# Altium PCB 继电器控制模块.PcbDoc
Units mm, origin at the board's own origin, x right, y up, seen from the top; angles counter-clockwise.
Board outline 101.6 x 152.4 mm, 2 copper layers (Top Layer, Bottom Layer); 35 components, 38 nets, 99 pads, 6 vias.
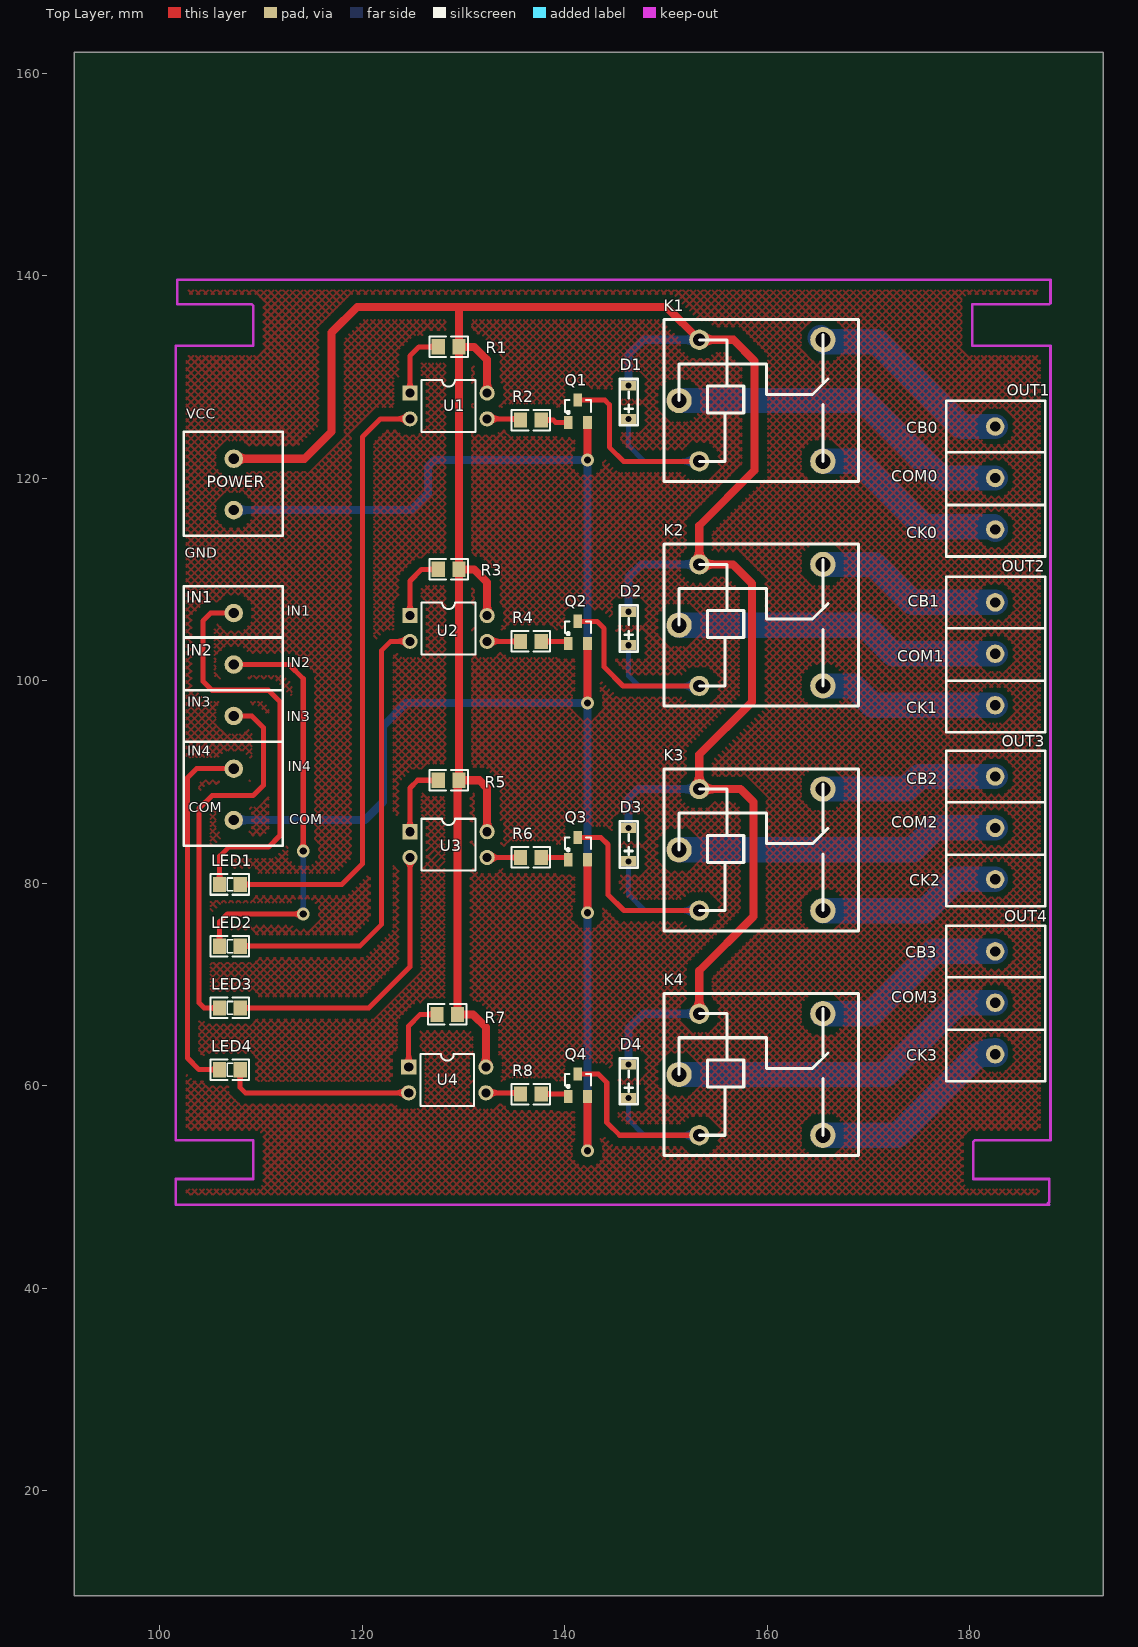
[diagram p0: Top Layer view]
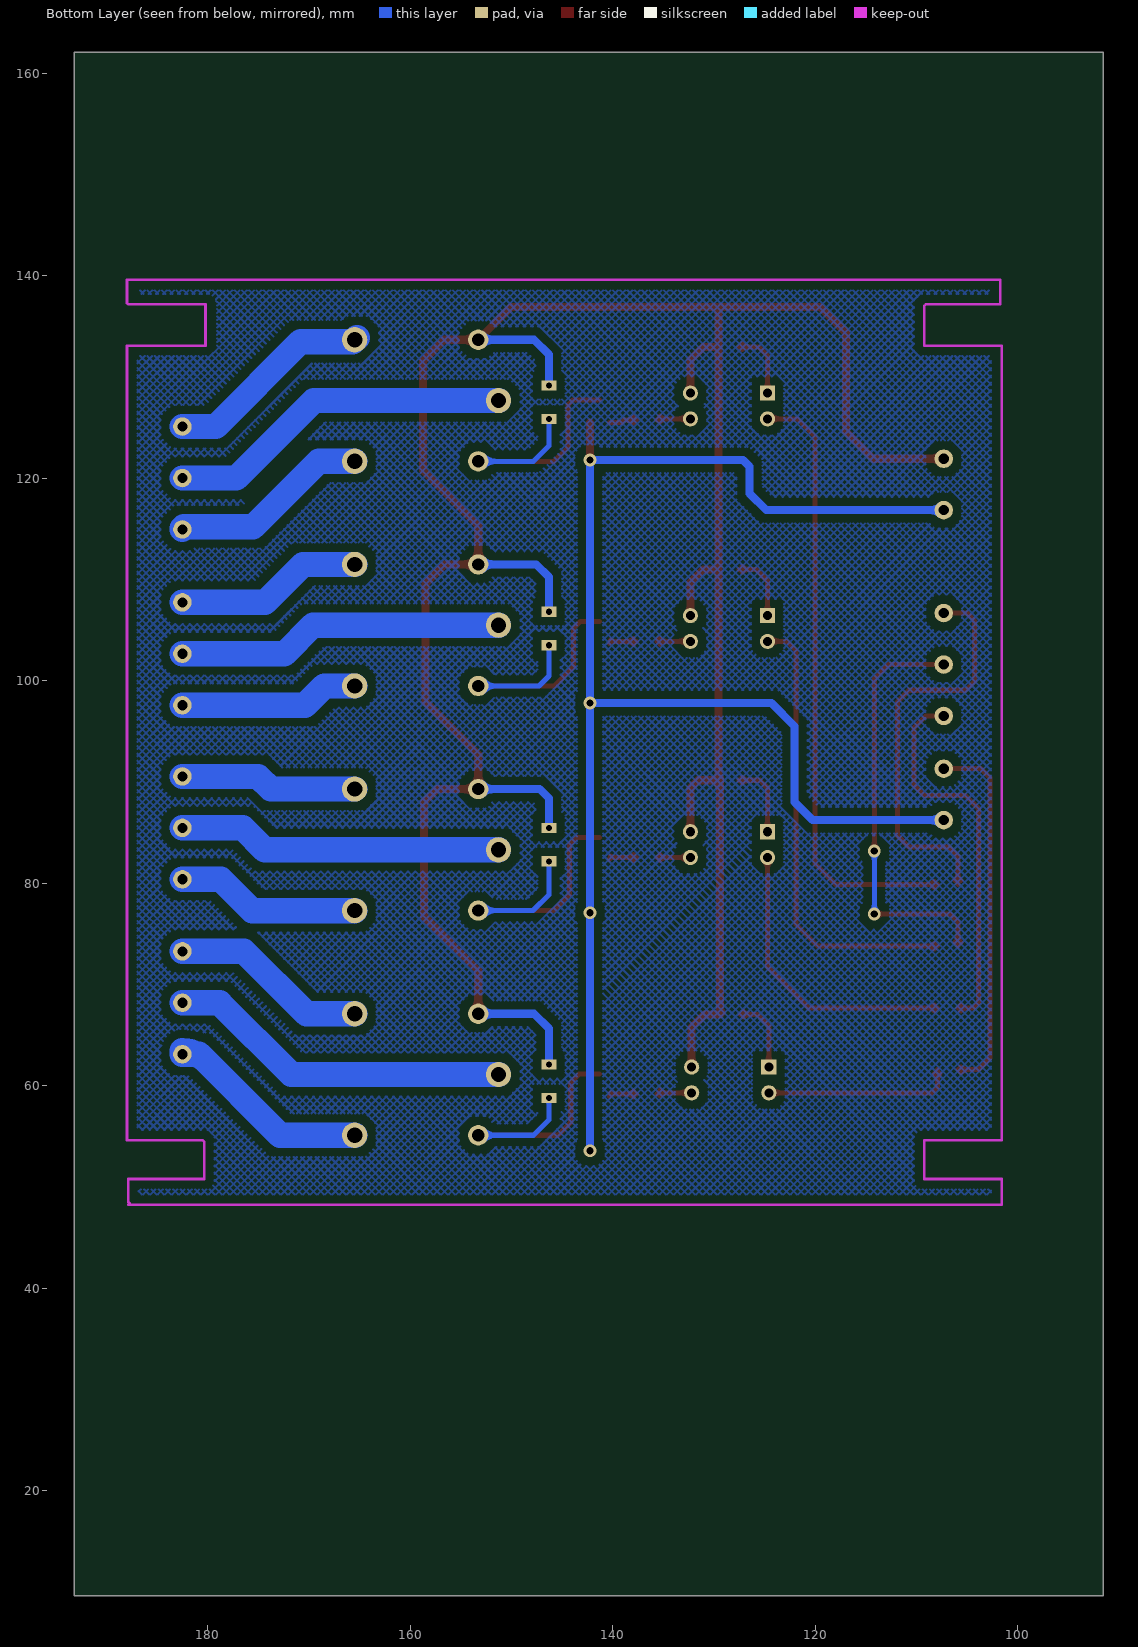
[diagram p1: Bottom Layer view, seen from below]

## Layer stack, top to bottom
Top Layer: signal copper 0.0356
Dielectric: dielectric 0.32, FR-4, Dk 4.8
Bottom Layer: signal copper 0.0356

## Board outline
193.167,9.652 193.167,162.052 91.567,162.052 91.567,9.652

## Design rules (kind name [scope] priority, off if disabled: settings)
Clearance [All] p1: gap=0.8
ComponentClearance [All] p1: gap=0.254 collisioncheckmode=3
PolygonConnect [All] p1: connectstyle=Relief reliefconductorwidth=0.254 reliefentries=4 polygonreliefangle="90 Angle"
RoutingVias [All] p1: holewidth=0.711 width=1.27 viastyle="Through Hole" minholewidth=0.711 minwidth=1.27 maxholewidth=0.711 maxwidth=1.27
SolderMaskExpansion [All] p1: expansion=0.102
TestPointUsage [All] p1: valid=0 allowmultiple=FALSE
Testpoint [All] p1: side=15 testpointundercomponent=TRUE minsize=1.016 maxsize=2.54 preferedsize=1.524 minholesize=0 maxholesize=1.016 preferedholesize=0.813 testpointgrid=0.025 style=1023 order=1234567890
Width Width_3 [InNet('VCC')] p1: maxlimit=0.8 minlimit=0.8 preferedwidth=0.8
Width Width_2 [InNet('GND')] p2: maxlimit=0.8 minlimit=0.8 preferedwidth=0.8
Width Width_1 [InNetClass('25')] p3: maxlimit=2.5 minlimit=2.5 preferedwidth=2.5
Width [All] p4: maxlimit=0.5 minlimit=0.5 preferedwidth=0.5
17 further rules are at their usual default settings.

## Classes and differential pairs
net class 25: NetK1_1 NetK1_2 NetK1_3 NetK2_1 NetK2_2 NetK2_3 NetK3_1 NetK3_2 NetK3_3 NetK4_1 NetK4_2 NetK4_3

## Components (designator, comment, footprint, x,y, rotation, side; value= is the part's Value field where it differs from the comment)
D1 "ZL2JG" TPDR 146.304,130.048 r90 top
D2 "ZL2JG" TPDR 146.304,107.696 r90 top
D3 "ZL2JG" TPDR 146.304,86.36 r90 top
D4 "ZL2JG" TPDR 146.304,62.992 r90 top
IN1 "PZ_3" JK128_3 105.41,101.473 r180 top
IN2 "PZ_2" JK128_2 106.172,86.741 r180 top
K1 "JDQYCK" JQC-3F/T73 151.765,122.174 r0 top
K2 "JDQYCK" JQC-3F/T73 151.765,99.991 r0 top
K3 "JDQYCK" JQC-3F/T73 151.765,77.809 r0 top
K4 "JDQYCK" JQC-3F/T73 151.765,55.626 r0 top
LED1 "" TP-0805-D 104.394,81.153 r180 top
LED2 "" TP-0805-D 104.394,75.057 r180 top
LED3 "" TP-0805-D 104.394,68.961 r180 top
LED4 "" TP-0805-D 104.394,62.865 r180 top
OUT1 "PZ_3" JK128_3 184.404,120.142 r0 top
OUT2 "PZ_3" JK128_3 184.404,102.785 r0 top
OUT3 "PZ_3" JK128_3 184.404,85.598 r0 top
OUT4 "PZ_3" JK128_3 184.404,68.326 r0 top
POWER "PZ_2" JK128_2 106.172,117.348 r180 top
Q1 "NPN" SO-G3 142.24,126.492 r0 top
Q2 "NPN" SO-G3 142.24,104.648 r0 top
Q3 "NPN" SO-G3 142.24,83.312 r0 top
Q4 "NPN" SO-G3 142.24,59.944 r0 top
R1 "Res" TP-0805-R 131.064,131.699 r0 top
R2 "Res" TP-0805-R 134.112,127 r180 top
R3 "Res" TP-0805-R 131.064,109.728 r0 top
R4 "Res" TP-0805-R 134.112,105.156 r180 top
R5 "Res" TP-0805-R 131.064,88.9 r0 top
R6 "Res" TP-0805-R 134.112,83.82 r180 top
R7 "Res" TP-0805-R 130.937,65.786 r0 top
R8 "Res" TP-0805-R 134.112,60.452 r180 top
U1 "GO" DIP-4 128.524,127.127 r270 top
U2 "GO" DIP-4 128.524,105.156 r270 top
U3 "GO" DIP-4 128.524,83.82 r270 top
U4 "GO" DIP-4 128.397,60.579 r270 top

## Footprints (in the part's own frame and the unit in brackets; to place one, negate y for a bottom-side part, rotate by r counter-clockwise, add the part's x,y. Pads: shape width x height; smd on the part's side, far side on the other; paste and mask are expansions set on the pad)
DIP-4 [mm] "DIP; 4 Leads; Row Spacing 7.62 mm; Pitch 2.54 mm"
  rect 1.5x1.5 hole 0.9: 1(-1.27,-3.81)
  round 1.5 hole 0.9: 2(1.27,-3.81) 3(1.27,3.81) 4(-1.27,3.81)
  silkscreen extent -2.55,-2.65 2.55,2.65
JK128_2 [mil] "接线端子"
  round 71.81 hole 39.37: 1(-45,20) 2(-45,-180)
  silkscreen extent -235,-285 150,120
JK128_3 [mm] "接线端子_3"
  round 1.824 hole 1: 1(-1.905,4.953) 2(-1.905,-0.127) 3(-1.905,-5.207)
  silkscreen extent -6.73,-7.87 3.05,7.49
JQC-3F/T73 [mm] "继电器"
  round 2.5 hole 1.5: 1(13.716,-0.508) 2(13.716,11.492) 3(-0.484,5.492)
  round 2 hole 1.2: 4(1.516,11.492) 5(1.516,-0.508)
  silkscreen extent -1.98,-2.51 17.22,13.49
SO-G3 [mm] "贴片三极管"
  rect 0.85x1.3 smd: 1(-1.9,-0.983) 2(0,-0.983) 3(-0.95,1.217)
  silkscreen extent -2.23,-0.12 0.32,1.22
TP-0805-D [mm] "贴片二极管"
  rect 1.3x1.5 smd: 1(-3.556,1.27) 2(-1.524,1.27)
  silkscreen extent -4.44,0.25 -0.64,2.29
TP-0805-R [mm] "贴片0805"
  rect 1.3x1.5 smd: 1(-3.556,1.27) 2(-1.524,1.27)
  silkscreen extent -4.44,0.25 -0.64,2.29
TPDR [mm] "贴片电容"
  rect 1x1.5 hole 0.6: 1(-4.191,0) 2(-0.889,0)
  silkscreen extent -4.83,-0.89 -0.25,0.89

## Part data
D1 D2 D3 D4: "整流二极管"
IN1 OUT1 OUT2 OUT3 OUT4: "排针——3"
IN2 POWER: "排针——2"
K1 K2 K3 K4: "继电器——1常开1常闭"
LED1 LED2 LED3 LED4: library part LED, "发光二极管"
Q1 Q2 Q3 Q4: "NPN Bipolar Transistor"
R1 R2 R3 R4 R5 R6 R7 R8: "电阻"
U1 U2 U3 U4: "光耦"

## Via types
v1: diameter 1.27, hole 0.711, Top Layer to Bottom Layer, 6 vias

## Nets (pads, with @x,y where several pads share a name; then routed paths per layer and width w, separated by ;. In a path a pad name is that pad's centre, name@x,y a point inside that pad or via, vN(x,y) a via of type N, cw(c..) or ccw(c..) an arc to the next point about the centre after c; other vN are vias at no path point)
GND: IN2.1 POWER.1 Q1.2 Q2.2 Q3.2 Q4.2 | length 178.8
  Top Layer w0.8: v1(142.24,53.594) Q4.2 ; v1(142.24,77.089) Q3.2 ; v1(142.24,97.79) Q2.2 ; v1(142.24,121.793) Q1.2
  Bottom Layer w0.8: IN2.1 120.269,86.233 122.047,88.011 122.047,95.504 124.333,97.79 v1(142.24,97.79) ; POWER.1 124.841,116.84 126.492,118.491 126.492,121.158 127.127,121.793 v1(142.24,121.793) v1(142.24,97.79) ; v1(142.24,53.594) 142.24,76.2 v1(142.24,77.089) v1(142.24,97.79) ; 108.551,86.233 ccw(c108.551,84.997) 107.677,85.871 cw(c108.551,84.997) 108.551,86.233 ; 108.551,86.233 cw(c108.551,87.469) 107.677,86.595 ccw(c108.551,87.469) 108.551,86.233 ; 108.551,116.84 ccw(c108.551,115.604) 107.677,116.478 cw(c108.551,115.604) 108.551,116.84 ; 108.551,116.84 cw(c108.551,118.076) 107.677,117.202 ccw(c108.551,118.076) 108.551,116.84
NetD1_1: D1.1 K1.5 Q1.3 | length 34.8
  Top Layer w0.5: Q1.3 143.944,127.709 144.399,127.254 144.399,123.063 145.796,121.666 K1.5
  Bottom Layer w0.5: D1.1 146.304,123.19 147.828,121.666 K1.5 ; 146.304,125.253 ccw(c145.7,125.253) 146.127,125.68 cw(c145.7,125.253) 146.304,125.253 ; 146.304,125.253 cw(c146.908,125.253) 146.481,125.68 ccw(c146.908,125.253) 146.304,125.253 ; 151.47,121.666 ccw(c151.47,123.477) 152.751,122.196 cw(c151.47,123.477) 151.47,121.666 ; 151.47,121.666 cw(c151.47,119.855) 152.751,121.136 ccw(c151.47,119.855) 151.47,121.666
NetD2_1: D2.1 K2.5 Q2.3 | length 34.9
  Top Layer w0.5: Q2.3 143.182,105.865 143.891,105.156 143.891,101.346 145.754,99.483 K2.5
  Bottom Layer w0.5: D2.1 146.304,100.457 147.278,99.483 K2.5 ; 146.304,102.901 ccw(c145.7,102.901) 146.127,103.328 cw(c145.7,102.901) 146.304,102.901 ; 146.304,102.901 cw(c146.908,102.901) 146.481,103.328 ccw(c146.908,102.901) 146.304,102.901 ; 151.47,99.483 ccw(c151.47,101.294) 152.751,100.014 cw(c151.47,101.294) 151.47,99.483 ; 151.47,99.483 cw(c151.47,97.673) 152.751,98.953 ccw(c151.47,97.673) 151.47,99.483
NetD3_1: D3.1 K3.5 Q3.3 | length 36.4
  Top Layer w0.5: Q3.3 143.563,84.529 144.272,83.82 144.272,78.867 145.838,77.301 K3.5
  Bottom Layer w0.5: D3.1 146.304,78.867 147.87,77.301 K3.5 ; 146.304,81.565 ccw(c145.7,81.565) 146.127,81.992 cw(c145.7,81.565) 146.304,81.565 ; 146.304,81.565 cw(c146.908,81.565) 146.481,81.992 ccw(c146.908,81.565) 146.304,81.565 ; 151.47,77.301 ccw(c151.47,79.111) 152.751,77.831 cw(c151.47,79.111) 151.47,77.301 ; 151.47,77.301 cw(c151.47,75.49) 152.751,76.77 ccw(c151.47,75.49) 151.47,77.301
NetD4_1: D4.1 K4.5 Q4.3 | length 34.4
  Top Layer w0.5: Q4.3 143.309,61.161 144.145,60.325 144.145,56.388 145.415,55.118 K4.5 K4.5@153.543,55.118
  Bottom Layer w0.5: D4.1 146.304,56.642 147.828,55.118 K4.5 ; 146.304,58.197 ccw(c145.7,58.197) 146.127,58.624 cw(c145.7,58.197) 146.304,58.197 ; 146.304,58.197 cw(c146.908,58.197) 146.481,58.624 ccw(c146.908,58.197) 146.304,58.197 ; 151.47,55.118 ccw(c151.47,56.929) 152.751,55.648 cw(c151.47,56.929) 151.47,55.118 ; 151.47,55.118 cw(c151.47,53.307) 152.751,54.588 ccw(c151.47,53.307) 151.47,55.118
NetIN1_1: IN1.1 LED3.2 | length 40.9
  Top Layer w0.5: LED3.2 104.394,67.691 103.886,68.199 103.886,87.376 105.156,88.646 109.22,88.646 110.236,89.662 110.236,95.377 109.093,96.52 IN1.1 ; 104.952,67.691 ccw(c104.952,68.657) 105.635,67.974 cw(c104.952,68.657) 104.952,67.691 ; 104.952,67.691 cw(c104.952,66.725) 105.635,67.408 ccw(c104.952,66.725) 104.952,67.691
NetIN1_2: IN1.2 LED2.2 | length 56.4
  Top Layer w0.5: LED2.2 105.918,76.2 106.68,76.962 v1(114.173,76.962) ; IN1.2 112.776,101.6 114.173,100.203 v1(114.173,83.185) ; 105.918,74.853 ccw(c106.884,74.853) 106.201,74.17 cw(c106.884,74.853) 105.918,74.853 ; 105.918,74.853 cw(c104.952,74.853) 105.635,74.17 ccw(c104.952,74.853) 105.918,74.853 ; 113.244,76.962 ccw(c113.244,77.891) 113.901,77.234 cw(c113.244,77.891) 113.244,76.962 ; 113.244,76.962 cw(c113.244,76.033) 113.901,76.69 ccw(c113.244,76.033) 113.244,76.962 ; 114.173,84.114 ccw(c115.102,84.114) 114.445,83.457 cw(c115.102,84.114) 114.173,84.114 ; 114.173,84.114 cw(c113.244,84.114) 113.901,83.457 ccw(c113.244,84.114) 114.173,84.114
  Bottom Layer w0.5: v1(114.173,76.962) v1(114.173,83.185) ; 114.173,77.891 ccw(c115.102,77.891) 114.445,77.234 cw(c115.102,77.891) 114.173,77.891 ; 114.173,77.891 cw(c113.244,77.891) 113.901,77.234 ccw(c113.244,77.891) 114.173,77.891 ; 114.173,82.256 ccw(c113.244,82.256) 113.901,82.913 cw(c113.244,82.256) 114.173,82.256 ; 114.173,82.256 cw(c115.102,82.256) 114.445,82.913 ccw(c115.102,82.256) 114.173,82.256
NetIN1_3: IN1.3 LED1.2 | length 43.6
  Top Layer w0.5: LED1.2 105.918,82.677 106.807,83.566 110.744,83.566 111.887,84.709 111.887,97.917 110.744,99.06 105.156,99.06 104.267,99.949 104.267,105.918 105.029,106.68 IN1.3 ; 105.918,80.949 ccw(c106.884,80.949) 106.201,80.266 cw(c106.884,80.949) 105.918,80.949 ; 105.918,80.949 cw(c104.952,80.949) 105.635,80.266 ccw(c104.952,80.949) 105.918,80.949
NetIN2_2: IN2.2 LED4.2 | length 39.3
  Top Layer w0.5: LED4.2 103.886,61.595 102.743,62.738 102.743,90.424 103.632,91.313 IN2.2 ; 104.952,61.595 ccw(c104.952,62.561) 105.635,61.878 cw(c104.952,62.561) 104.952,61.595 ; 104.952,61.595 cw(c104.952,60.629) 105.635,61.312 ccw(c104.952,60.629) 104.952,61.595
NetK1_1: K1.1 OUT1.3 | length 20.2
  Bottom Layer w2.5: K1.1 169.037,121.666 175.514,115.189 OUT1.3@182.245,115.189 ; OUT1.3@182.245,115.189 182.372,115.189 182.499,115.062 OUT1.3 OUT1.3@182.245,115.189
NetK1_2: K1.2 OUT1.1 | length 20.9
  Bottom Layer w2.5: K1.2@165.227,133.858 165.289,133.858 K1.2 165.67,133.477 170.815,133.477 179.197,125.095 OUT1.1
NetK1_3: K1.3 OUT1.2 | length 34.4
  Bottom Layer w2.5: K1.3 169.514,127.666 177.165,120.015 OUT1.2
NetK2_1: K2.1 OUT2.3 | length 17.8
  Bottom Layer w2.5: K2.1 168.487,99.483 170.392,97.578 OUT2.3
NetK2_2: K2.2 OUT2.1 | length 18.6
  Bottom Layer w2.5: K2.2 170.584,111.483 174.329,107.738 OUT2.1
NetK2_3: K2.3 OUT2.2 | length 32.4
  Bottom Layer w2.5: K2.3 169.599,105.483 172.424,102.658 OUT2.2
NetK3_1: K3.1 OUT3.3 | length 18.3
  Bottom Layer w2.5: K3.1 175.599,77.301 178.689,80.391 OUT3.3
NetK3_2: K3.2 OUT3.1 | length 17.5
  Bottom Layer w2.5: K3.2 173.756,89.301 175.006,90.551 OUT3.1
NetK3_3: K3.3 OUT3.2 | length 32.1
  Bottom Layer w2.5: K3.3 174.36,83.301 176.53,85.471 OUT3.2
NetK4_1: K4.1 OUT4.3 | length 30.3
  Bottom Layer w2.5: K4.1 172.847,55.118 180.848,63.119 OUT4.3 ; 180.258,62.529 cw(c182.499,60.287) OUT4.3@182.499,63.457 ; 180.258,62.529 cw(c182.499,60.287) OUT4.3@182.499,63.457 ; 180.258,62.529 cw(c182.499,60.287) OUT4.3@182.499,63.457 ; 180.258,62.529 cw(c182.499,60.287) OUT4.3@182.499,63.457
NetK4_2: K4.2 OUT4.1 | length 19.6
  Bottom Layer w2.5: K4.2 170.242,67.118 176.403,73.279 OUT4.1
NetK4_3: K4.3 OUT4.2 | length 34.2
  Bottom Layer w2.5: K4.3 171.735,61.118 178.816,68.199 OUT4.2
NetLED1_1: LED1.1 U1.2 | length 67.3
  Top Layer w0.5: LED1.1 117.983,79.883 120.015,81.915 120.015,124.079 121.793,125.857 U1.2 ; 108.916,79.883 ccw(c108.916,78.917) 108.233,79.6 cw(c108.916,78.917) 108.916,79.883 ; 108.916,79.883 cw(c108.916,80.849) 108.233,80.166 ccw(c108.916,80.849) 108.916,79.883 ; 123.507,125.857 ccw(c123.507,127.064) 124.36,126.211 cw(c123.507,127.064) 123.507,125.857 ; 123.507,125.857 cw(c123.507,124.65) 124.36,125.503 ccw(c123.507,124.65) 123.507,125.857
NetLED2_1: LED2.1 U2.2 | length 51.9
  Top Layer w0.5: LED2.1 119.761,73.787 121.92,75.946 121.92,102.997 122.809,103.886 U2.2 ; 108.916,73.787 ccw(c108.916,72.821) 108.233,73.504 cw(c108.916,72.821) 108.916,73.787 ; 108.916,73.787 cw(c108.916,74.753) 108.233,74.07 ccw(c108.916,74.753) 108.916,73.787 ; 123.507,103.886 ccw(c123.507,105.093) 124.36,104.24 cw(c123.507,105.093) 123.507,103.886 ; 123.507,103.886 cw(c123.507,102.679) 124.36,103.532 ccw(c123.507,102.679) 123.507,103.886
NetLED3_1: LED3.1 U3.2 | length 36.1
  Top Layer w0.5: LED3.1 120.65,67.691 124.714,71.755 U3.2 ; 108.916,67.691 ccw(c108.916,66.725) 108.233,67.408 cw(c108.916,66.725) 108.916,67.691 ; 108.916,67.691 cw(c108.916,68.657) 108.233,67.974 ccw(c108.916,68.657) 108.916,67.691 ; 124.714,81.343 ccw(c123.507,81.343) 124.36,82.196 cw(c123.507,81.343) 124.714,81.343 ; 124.714,81.343 cw(c125.921,81.343) 125.068,82.196 ccw(c125.921,81.343) 124.714,81.343
NetLED4_1: LED4.1 U4.2 | length 25.5
  Top Layer w0.5: LED4.1 107.95,59.817 108.458,59.309 U4.2 ; 107.95,60.529 ccw(c106.984,60.529) 107.667,61.212 cw(c106.984,60.529) 107.95,60.529 ; 107.95,60.529 cw(c108.916,60.529) 108.233,61.212 ccw(c108.916,60.529) 107.95,60.529 ; 123.38,59.309 ccw(c123.38,60.516) 124.233,59.663 cw(c123.38,60.516) 123.38,59.309 ; 123.38,59.309 cw(c123.38,58.102) 124.233,58.955 ccw(c123.38,58.102) 123.38,59.309
NetQ1_1: Q1.1 R2.1 | length 5.8
  Top Layer w0.5: R2.1 138.887,125.73 139.108,125.509 Q1.1 ; 138.634,125.73 ccw(c138.634,124.764) 137.951,125.447 cw(c138.634,124.764) 138.634,125.73 ; 138.634,125.73 cw(c138.634,126.696) 137.951,126.013 ccw(c138.634,126.696) 138.634,125.73
NetQ2_1: Q2.1 R4.1 | length 6.5
  Top Layer w0.5: R4.1 140.119,103.886 Q2.1 ; 138.634,103.886 ccw(c138.634,102.92) 137.951,103.603 cw(c138.634,102.92) 138.634,103.886 ; 138.634,103.886 cw(c138.634,104.852) 137.951,104.169 ccw(c138.634,104.852) 138.634,103.886 ; 139.907,103.886 ccw(c139.907,104.323) 140.216,104.014 cw(c139.907,104.323) 139.907,103.886
NetQ3_1: Q3.1 R6.1 | length 6.5
  Top Layer w0.5: R6.1 140.208,82.55 140.34,82.418 Q3.1 ; 138.634,82.55 ccw(c138.634,81.584) 137.951,82.267 cw(c138.634,81.584) 138.634,82.55 ; 138.634,82.55 cw(c138.634,83.516) 137.951,82.833 ccw(c138.634,83.516) 138.634,82.55 ; 139.907,82.55 ccw(c139.907,82.987) 140.216,82.678 cw(c139.907,82.987) 139.907,82.55
NetQ4_1: Q4.1 R8.1 | length 6.5
  Top Layer w0.5: R8.1 140.119,59.182 Q4.1 ; 138.634,59.182 ccw(c138.634,58.216) 137.951,58.899 cw(c138.634,58.216) 138.634,59.182 ; 138.634,59.182 cw(c138.634,60.148) 137.951,59.465 ccw(c138.634,60.148) 138.634,59.182 ; 139.907,59.182 ccw(c139.907,59.619) 140.216,59.31 cw(c139.907,59.619) 139.907,59.182
NetR1_1: R1.1 U1.1 | length 13.7
  Top Layer w0.5: U1.1 124.714,132.08 125.603,132.969 R1.1 ; 124.714,129.604 ccw(c125.921,129.604) 125.068,128.751 cw(c125.921,129.604) 124.714,129.604 ; 124.714,129.604 cw(c123.507,129.604) 124.36,128.751 ccw(c123.507,129.604) 124.714,129.604 ; 126.542,132.969 ccw(c126.542,133.935) 127.225,133.252 cw(c126.542,133.935) 126.542,132.969 ; 126.542,132.969 cw(c126.542,132.003) 127.225,132.686 ccw(c126.542,132.003) 126.542,132.969
NetR2_2: R2.2 U1.3 | length 10.2
  Top Layer w0.5: U1.3 135.509,125.857 R2.2 ; 133.541,125.857 ccw(c133.541,124.65) 132.688,125.503 cw(c133.541,124.65) 133.541,125.857 ; 133.541,125.857 cw(c133.541,127.064) 132.688,126.211 ccw(c133.541,127.064) 133.541,125.857 ; 134.605,125.857 cw(c134.605,124.799) 135.353,125.547 ccw(c134.605,124.799) 134.605,125.857 ; 134.736,125.857 ccw(c134.736,126.73) 135.353,126.113 cw(c134.736,126.73) 134.736,125.857
NetR3_1: R3.1 U2.1 | length 13.5
  Top Layer w0.5: U2.1 124.714,109.855 125.857,110.998 R3.1 ; 124.714,107.633 ccw(c125.921,107.633) 125.068,106.78 cw(c125.921,107.633) 124.714,107.633 ; 124.714,107.633 cw(c123.507,107.633) 124.36,106.78 ccw(c123.507,107.633) 124.714,107.633 ; 126.542,110.998 ccw(c126.542,111.964) 127.225,111.281 cw(c126.542,111.964) 126.542,110.998 ; 126.542,110.998 cw(c126.542,110.032) 127.225,110.715 ccw(c126.542,110.032) 126.542,110.998
NetR4_2: R4.2 U2.3 | length 10.5
  Top Layer w0.5: U2.3 135.255,103.886 R4.2@135.445,104.076 ; R4.2@135.509,104.14 R4.2@135.445,104.076 ; R4.2 135.445,103.886 R4.2@135.445,104.076 ; 133.541,103.886 ccw(c133.541,102.679) 132.688,103.532 cw(c133.541,102.679) 133.541,103.886 ; 133.541,103.886 cw(c133.541,105.093) 132.688,104.24 ccw(c133.541,105.093) 133.541,103.886 ; 134.67,103.886 ccw(c134.67,104.852) 135.353,104.169 cw(c134.67,104.852) 134.67,103.886 ; 134.67,103.886 cw(c134.67,102.92) 135.353,103.603 ccw(c134.67,102.92) 134.67,103.886
NetR5_1: R5.1 U3.1 | length 14.3
  Top Layer w0.5: U3.1 124.714,89.408 125.476,90.17 R5.1 ; 124.714,86.297 ccw(c125.921,86.297) 125.068,85.444 cw(c125.921,86.297) 124.714,86.297 ; 124.714,86.297 cw(c123.507,86.297) 124.36,85.444 ccw(c123.507,86.297) 124.714,86.297 ; 126.542,90.17 ccw(c126.542,91.136) 127.225,90.453 cw(c126.542,91.136) 126.542,90.17 ; 126.542,90.17 cw(c126.542,89.204) 127.225,89.887 ccw(c126.542,89.204) 126.542,90.17
NetR6_2: R6.2 U3.3 | length 10.1
  Top Layer w0.5: U3.3 R6.2 ; 133.541,82.55 ccw(c133.541,81.343) 132.688,82.196 cw(c133.541,81.343) 133.541,82.55 ; 133.541,82.55 cw(c133.541,83.757) 132.688,82.904 ccw(c133.541,83.757) 133.541,82.55 ; 134.67,82.55 ccw(c134.67,83.516) 135.353,82.833 cw(c134.67,83.516) 134.67,82.55 ; 134.67,82.55 cw(c134.67,81.584) 135.353,82.267 ccw(c134.67,81.584) 134.67,82.55
NetR7_1: R7.1 U4.1 | length 14.2
  Top Layer w0.5: U4.1 124.587,65.913 125.73,67.056 R7.1 ; 124.587,63.056 ccw(c125.794,63.056) 124.941,62.203 cw(c125.794,63.056) 124.587,63.056 ; 124.587,63.056 cw(c123.38,63.056) 124.233,62.203 ccw(c123.38,63.056) 124.587,63.056 ; 126.415,67.056 ccw(c126.415,68.022) 127.098,67.339 cw(c126.415,68.022) 126.415,67.056 ; 126.415,67.056 cw(c126.415,66.09) 127.098,66.773 ccw(c126.415,66.09) 126.415,67.056
NetR8_2: R8.2 U4.3 | length 10.3
  Top Layer w0.5: U4.3 135.509,59.309 R8.2 ; 133.414,59.309 ccw(c133.414,58.102) 132.561,58.955 cw(c133.414,58.102) 133.414,59.309 ; 133.414,59.309 cw(c133.414,60.516) 132.561,59.663 ccw(c133.414,60.516) 133.414,59.309 ; 134.605,59.309 cw(c134.605,58.251) 135.353,58.999 ccw(c134.605,58.251) 134.605,59.309 ; 134.736,59.309 ccw(c134.736,60.182) 135.353,59.565 cw(c134.736,60.182) 134.736,59.309
VCC: D1.2 D2.2 D3.2 D4.2 K1.4 K2.4 K3.4 K4.4 POWER.2 R1.2 R3.2 R5.2 R7.2 U1.4 U2.4 U3.4 U4.4 | length 348.4
  Top Layer w0.8: POWER.2 114.3,121.92 116.967,124.587 116.967,134.366 119.507,136.906 150.041,136.906 K1.4 156.656,133.666 158.75,131.572 158.75,120.777 153.281,115.308 K2.4 156.614,111.483 158.496,109.601 158.496,97.917 153.281,92.702 K3.4 157.333,89.301 158.623,88.011 158.623,76.708 153.281,71.366 K4.4 ; R7.2@129.286,67.31 129.286,67.183 R7.2 ; R5.2@129.413,90.424 129.413,90.297 R5.2 ; 129.54,136.906 R1.2 ; U4.4 132.207,65.786 130.937,67.056 R7.2 ; U3.4 132.334,89.408 131.572,90.17 R5.2 ; U2.4 132.334,109.728 131.064,110.998 R3.2 ; U1.4 132.334,131.699 131.064,132.969 R1.2 ; 108.551,121.92 ccw(c108.551,120.684) 107.677,121.558 cw(c108.551,120.684) 108.551,121.92 ; 108.551,121.92 cw(c108.551,123.156) 107.677,122.282 ccw(c108.551,123.156) 108.551,121.92 ; R7.2 129.413,90.043 R5.2 ; R5.2 R3.2 ; R3.2 R1.2 ; 132.207,62.694 ccw(c133.052,62.694) 132.454,62.096 cw(c133.052,62.694) 132.207,62.694 ; 132.207,62.694 cw(c131.362,62.694) 131.96,62.096 ccw(c131.362,62.694) 132.207,62.694 ; 132.334,85.935 ccw(c133.179,85.935) 132.581,85.337 cw(c133.179,85.935) 132.334,85.935 ; 132.334,85.935 cw(c131.489,85.935) 132.087,85.337 ccw(c131.489,85.935) 132.334,85.935 ; 132.334,107.271 ccw(c133.179,107.271) 132.581,106.673 cw(c133.179,107.271) 132.334,107.271 ; 132.334,107.271 cw(c131.489,107.271) 132.087,106.673 ccw(c131.489,107.271) 132.334,107.271 ; 132.334,129.242 ccw(c133.179,129.242) 132.581,128.644 cw(c133.179,129.242) 132.334,129.242 ; 132.334,129.242 cw(c131.489,129.242) 132.087,128.644 ccw(c131.489,129.242) 132.334,129.242 ; 153.281,68.567 ccw(c154.73,68.567) 153.705,67.542 cw(c154.73,68.567) 153.281,68.567 ; 153.281,68.567 cw(c151.832,68.567) 152.857,67.542 ccw(c151.832,68.567) 153.281,68.567 ; 153.281,90.749 ccw(c154.73,90.749) K3.4@153.705,89.725 ; 153.281,90.749 cw(c151.832,90.749) 152.857,89.725 ccw(c151.832,90.749) 153.281,90.749 ; 153.281,90.749 ccw(c154.73,90.749) K3.4@153.705,89.725 ; 153.281,112.932 ccw(c154.73,112.932) K2.4@153.705,111.908 ; 153.281,112.932 cw(c151.832,112.932) 152.857,111.908 ccw(c151.832,112.932) 153.281,112.932 ; 153.281,112.932 ccw(c154.73,112.932) K2.4@153.705,111.908 ; K3.4@153.705,89.725 ccw(c154.73,90.749) 154.73,89.301 ; K3.4@153.705,89.725 ccw(c154.73,90.749) 154.73,89.301 ; K2.4@153.705,111.908 ccw(c154.73,112.932) 154.73,111.483 ; K2.4@153.705,111.908 ccw(c154.73,112.932) 154.73,111.483 ; 154.73,89.301 ccw(c154.73,87.852) 153.705,88.876 cw(c154.73,87.852) 154.73,89.301 ; 154.73,111.483 ccw(c154.73,110.035) 153.705,111.059 cw(c154.73,110.035) 154.73,111.483 ; 154.73,133.666 ccw(c154.73,132.217) 153.705,133.242 cw(c154.73,132.217) 154.73,133.666 ; 154.73,133.666 cw(c154.73,135.115) 153.705,134.09 ccw(c154.73,135.115) 154.73,133.666 ; 129.413,89.16 cw(c130.45,89.16) 129.717,89.893 ccw(c130.45,89.16) 129.413,89.16
  Bottom Layer w0.8: D4.2 146.304,65.659 147.763,67.118 K4.4 ; D3.2 146.304,88.392 147.213,89.301 K3.4 ; D2.2 146.304,110.236 147.551,111.483 K2.4 ; D1.2 146.304,132.207 147.763,133.666 K1.4 ; 151.832,67.118 ccw(c151.832,68.567) 152.857,67.542 cw(c151.832,68.567) 151.832,67.118 ; 151.832,67.118 cw(c151.832,65.669) 152.857,66.694 ccw(c151.832,65.669) 151.832,67.118 ; 151.832,89.301 ccw(c151.832,90.749) 152.857,89.725 cw(c151.832,90.749) 151.832,89.301 ; 151.832,89.301 cw(c151.832,87.852) 152.857,88.876 ccw(c151.832,87.852) 151.832,89.301 ; 151.832,111.483 ccw(c151.832,112.932) 152.857,111.908 cw(c151.832,112.932) 151.832,111.483 ; 151.832,111.483 cw(c151.832,110.035) 152.857,111.059 ccw(c151.832,110.035) 151.832,111.483 ; 151.832,133.666 ccw(c151.832,135.115) 152.857,134.09 cw(c151.832,135.115) 151.832,133.666 ; 151.832,133.666 cw(c151.832,132.217) 152.857,133.242 ccw(c151.832,132.217) 151.832,133.666

## Polygon pours and split planes (outlines as drawn)
no net on Top Layer (hatched 45Degree grid 0.508 track 0.203): 102.235,139.192 187.833,139.192 187.833,137.541 179.578,137.541 179.578,132.334 187.579,132.334 187.579,54.991 179.959,54.991 179.959,50.038 187.579,50.038 187.579,48.768 102.108,48.768 102.108,50.419 109.601,50.419 109.601,54.737 101.854,54.737 101.854,132.715 109.601,132.715 109.601,137.668 102.235,137.668
no net on Bottom Layer (hatched 45Degree grid 0.508 track 0.203): 102.489,139.192 102.489,137.922 109.728,137.922 109.728,132.461 102.362,132.461 102.362,55.372 109.347,55.372 109.347,50.546 102.235,50.546 102.235,49.022 187.071,49.022 187.071,50.292 179.705,50.292 179.705,55.245 187.198,55.245 187.198,132.588 179.07,132.588 179.07,137.414 187.325,137.414 187.325,139.065 102.489,139.065

## Keep-outs
Keep-Out Layer:
  lines w0.254: 101.6,48.26 101.6,50.8 109.22,50.8 109.22,54.61 101.6,54.61 101.6,133.096 109.22,133.096 109.22,137.033 109.093,137.16 101.727,137.16 101.727,139.573 187.96,139.573 187.96,137.287 187.833,137.16 180.213,137.16 180.213,133.096 187.96,133.096 187.96,54.61 180.467,54.61 180.34,54.483 180.34,50.8 187.833,50.8 187.833,48.514 187.706,48.387 187.833,48.26 101.6,48.26

## Silkscreen, mask and mechanical layers (free items; w line width, h text height)
Top Overlay:
  text "VCC" at 102.616,125.857 h1.02
  text "CB0" at 173.736,124.46 h1.12
  text "COM0" at 172.212,119.634 h1.12
  text "CK0" at 173.736,114.046 h1.12
  text "GND" at 102.489,112.141 h1.02
  text "CB1" at 173.863,107.315 h1.12
  text "IN1" at 112.522,106.426 h1.02
  text "COM1" at 172.847,101.854 h1.12
  text "IN2" at 112.522,101.346 h1.02
  text "IN3" at 102.743,97.409 h1.02
  text "CK1" at 173.736,96.774 h1.12
  text "IN3" at 112.522,96.012 h1.02
  text "IN4" at 102.743,92.583 h1.02
  text "IN4" at 112.649,91.059 h1.02
  text "CB2" at 173.736,89.789 h1.12
  text "COM" at 102.87,86.995 h1.02
  text "COM" at 112.776,85.852 h1.02
  text "COM2" at 172.212,85.471 h1.12
  text "CK2" at 173.99,79.756 h1.12
  text "CB3" at 173.609,72.644 h1.12
  text "COM3" at 172.212,68.199 h1.12
  text "CK3" at 173.736,62.484 h1.12
Bottom Solder:
  lines w2.254: 151.281,61.118 171.735,61.118 178.816,68.199 182.499,68.199 ; 151.281,83.301 174.487,83.301 176.657,85.471 182.499,85.471 ; 151.281,105.483 169.472,105.483 172.297,102.658 182.499,102.658 ; 151.281,127.666 169.514,127.666 177.165,120.015 182.499,120.015 ; 165.227,77.343 165.439,77.343 175.514,77.343 178.562,80.391 182.499,80.391 ; 165.481,55.118 173.101,55.118 181.102,63.119 182.499,63.119 ; 165.481,67.118 170.242,67.118 176.403,73.279 182.499,73.279 ; 165.481,89.301 173.756,89.301 175.006,90.551 182.499,90.551 ; 165.481,99.483 168.487,99.483 170.392,97.578 182.499,97.578 ; 165.481,111.483 170.711,111.483 174.456,107.738 182.499,107.738 ; 165.481,121.666 168.91,121.666 175.641,114.935 182.499,114.935 ; 165.481,133.666 170.753,133.666 179.324,125.095 182.499,125.095
Mechanical 1:
  lines w0.254: 98.425,137.795 98.933,139.319 ; 98.427,49.531 98.935,48.007 ; 98.679,139.319 99.187,139.319 ; 98.681,48.007 99.189,48.007 ; 98.934,85.131 98.935,48.007 ; 98.934,102.195 98.933,139.319 ; 99.441,137.795 98.933,139.319 ; 99.443,49.531 98.935,48.007 ; 101.559,43.18 101.559,43.688 ; 103.083,42.926 101.559,43.434 ; 103.083,43.942 101.559,43.434 ; 136.525,43.434 101.559,43.434 ; 152.573,43.434 187.538,43.434 ; 185.547,48.26 187.833,48.26 ; 186.014,42.926 187.538,43.434 ; 186.014,43.942 187.538,43.434 ; 187.538,43.18 187.538,43.688 ; 187.833,48.26 101.6,48.26 101.6,50.8 109.22,50.8 109.22,54.61 101.6,54.61 101.6,133.096 109.093,133.096 109.22,133.223 109.22,137.16 101.727,137.16 101.727,139.573 187.96,139.573 187.96,137.16 180.213,137.16 180.213,133.096 187.96,133.096 187.96,54.61 180.467,54.61 180.34,54.483 180.34,50.8 187.706,50.8 187.833,50.673 187.833,48.26
  text "91.3123 (mm)" at 98.02,101.941 h1.52 r270
  text "85.979 (mm)" at 136.779,42.52 h1.52